# Altium PCB kernel_RJ45.PcbDoc
Units mil, origin at the board's own origin, x right, y up, seen from the top; angles counter-clockwise.
Board outline 1250 x 780 mil, 2 copper layers (Top Layer, Bottom Layer); 5 components, 13 nets, 36 pads, 28 vias.
Unrouted connection lines stored in the file: 1.
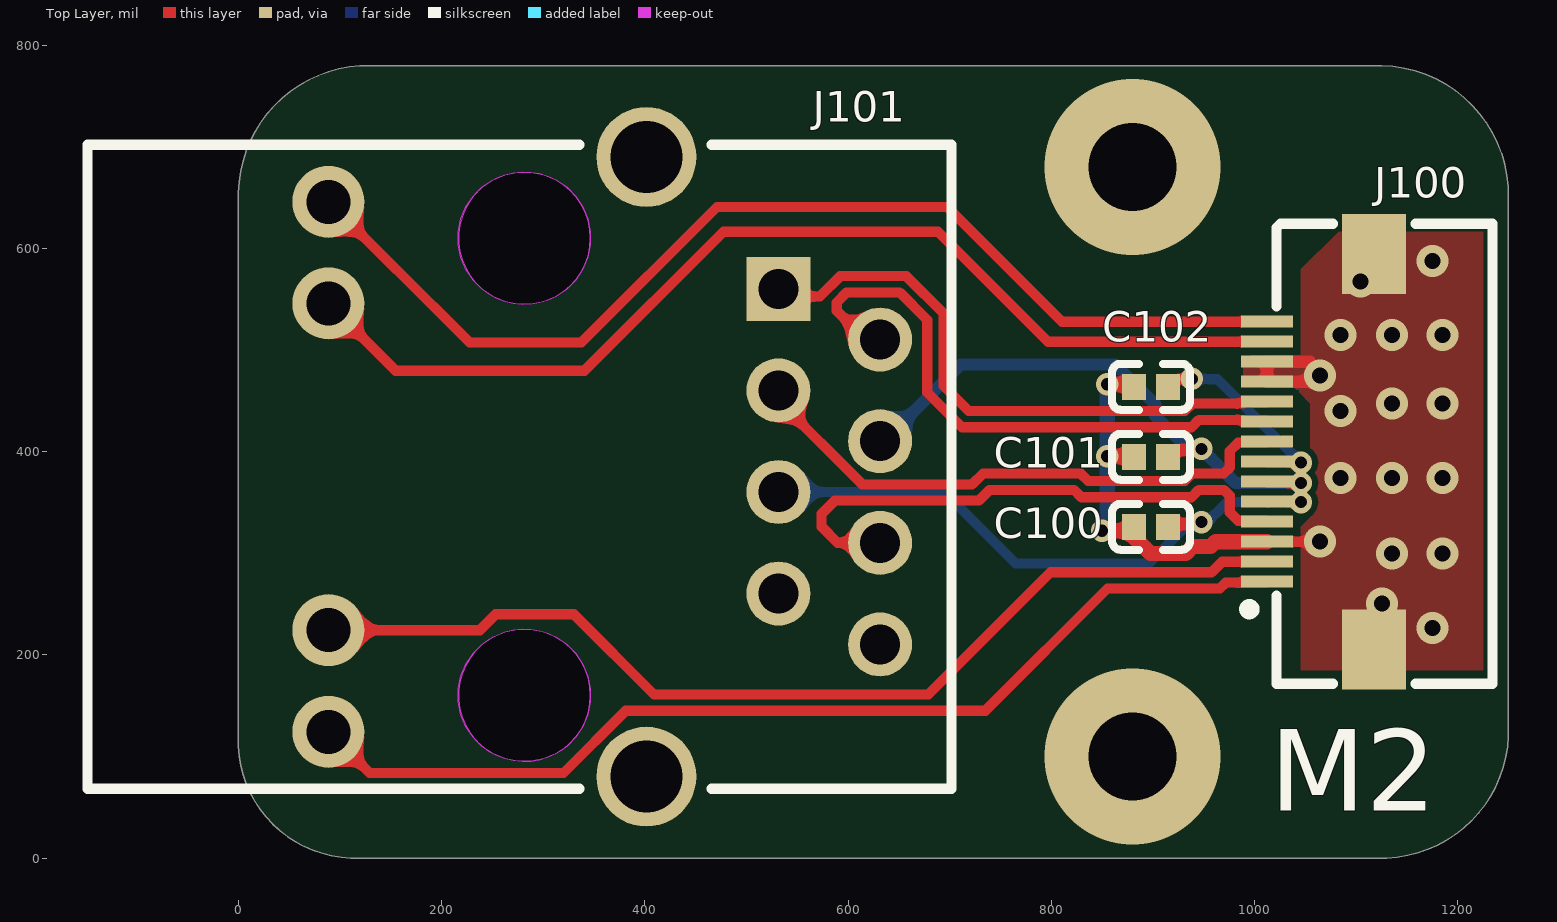
[diagram p0: Top Layer view]
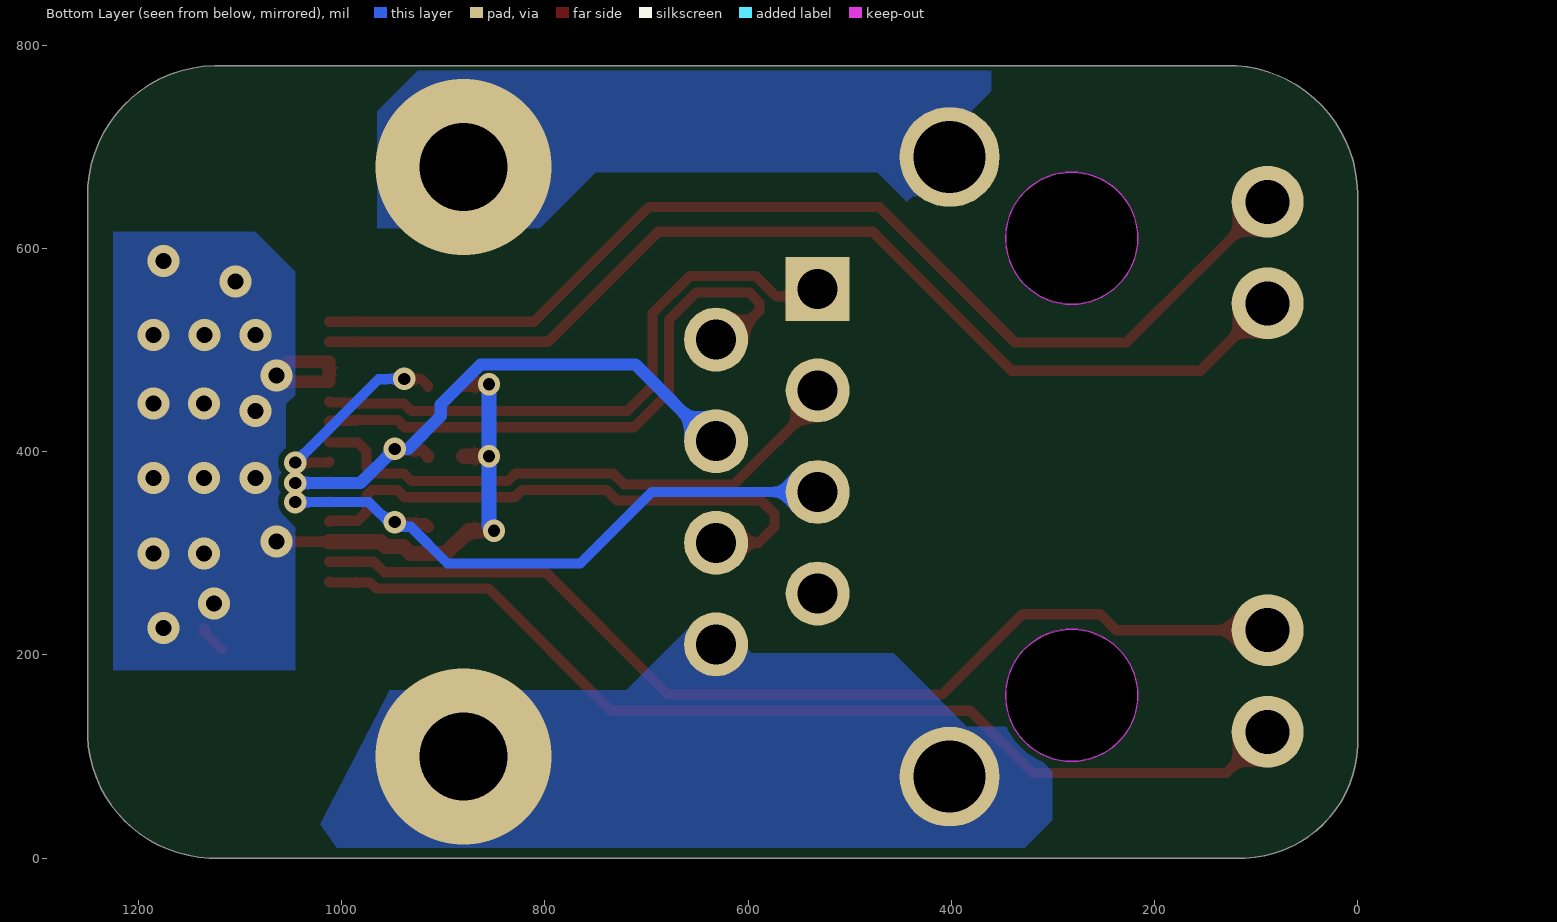
[diagram p1: Bottom Layer view, seen from below]
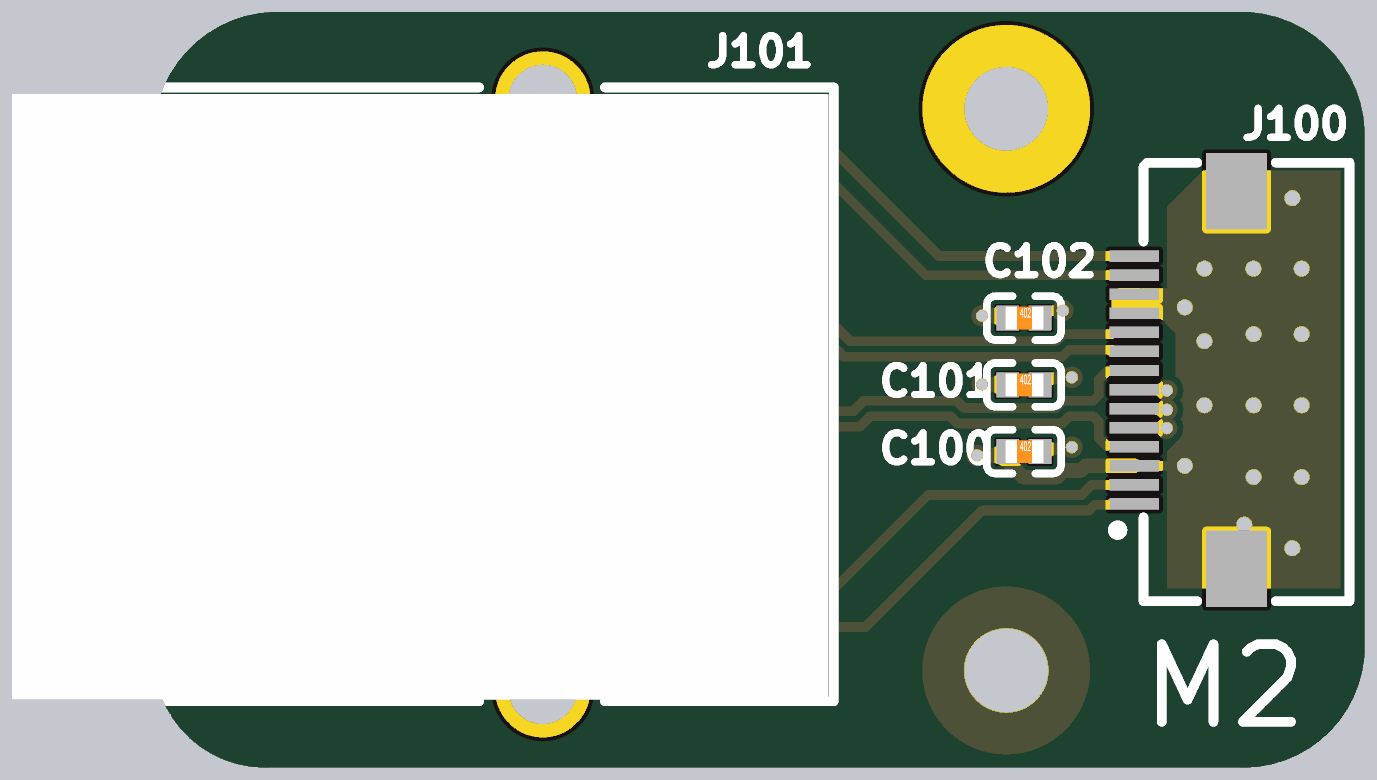
[diagram p2: 3D render of the assembled board from above, using the file's embedded part models]

## Layer stack, top to bottom
Top Solder: solder mask 0.4, Solder Resist, Dk 3.5
Top Layer: signal copper 1.4
Dielectric 1: dielectric 12.6, FR-4, Dk 4.8
Bottom Layer: signal copper 1.4
Bottom Solder: solder mask 0.4, Solder Resist, Dk 3.5

## Board outline
120,0 cw(c115,115) 0,110 0,655 cw(c127.5,652.5) 130,780 1125,780 cw(c1122.5,652.5) 1250,650 1250,120 cw(c1125,125) 1120,0

## Design rules (kind name [scope] priority, off if disabled: settings)
Clearance [All] p1: gap=6 ignorepadtopadclearanceinfootprint=FALSE
DiffPairsRouting DiffPair_DiffPairsRouting [InDifferentialPair ('D_TPRX')] p1: maxlimit=10 minlimit=6 mostfreqgap=6 toplayer_minwidth=6 toplayer_maxwidth=10 toplayer_prefwidth=6 bottomlayer_minwidth=6 bottomlayer_maxwidth=10 bottomlayer_prefwidth=6 maxuncoupledlength=500
DiffPairsRouting [All] p2: maxlimit=10 minlimit=10 mostfreqgap=10 toplayer_minwidth=15 toplayer_maxwidth=15 toplayer_prefwidth=15 bottomlayer_minwidth=15 bottomlayer_maxwidth=15 bottomlayer_prefwidth=15 maxuncoupledlength=500
PolygonConnect [All] p1: connectstyle=Direct reliefconductorwidth=10 reliefentries=4 polygonreliefangle="90 Angle" airgapwidth=10
RoutingVias [All] p1: holewidth=28 width=50 viastyle="Through Hole" minholewidth=28 minwidth=50 maxholewidth=28 maxwidth=50
SolderMaskExpansion [All] p1: expansion=4 istentingtop=FALSE
Width [InNetClass('电源')] p1: maxlimit=15 minlimit=10 preferedwidth=12 minimp=50.000000 maximp=50.000000 favimp=50.000000
29 further rules are at their usual default settings.

## Classes and differential pairs
net class 机壳地: SGND
net class 信号: LINKA LINKK SPEEDA SPEEDK
net class 电源: GND NetC100_2 NetC101_2 NetC102_2
differential pair D_TPRX: +TPRX_P -TPRX_N
differential pair D_TPTX: +TPTX_P -TPTX_N

## Components (designator, comment, footprint, x,y, rotation, side; value= is the part's Value field where it differs from the comment)
C100 "104" 0402_C 898.27,326.1 r0 top value=20pF
C101 "104" 0402_C 898.27,395 r0 top value=20pF
C102 "104" 0402_C 898.27,463.9 r0 top value=20pF
J100 "AFC01-S14FCA-00" FPC-SMD_AFC01-S14FCA-00 1065,400 r90 top
J101 "HR911105A" RJ45-TH_HR911105A 360,385.16 r270 top

## Footprints (in the part's own frame and the unit in brackets; to place one, negate y for a bottom-side part, rotate by r counter-clockwise, add the part's x,y. Pads: shape width x height; smd on the part's side, far side on the other; paste and mask are expansions set on the pad)
0402_C [mm]
  rect 0.6x0.65 smd mask+0.051: 1(-0.425,0) 2(0.425,0)
  silkscreen extent -0.97,-0.58 0.97,0.58, body extent -0.48,-0.3 0.52,0.3, height 0.2
FPC-SMD_AFC01-S14FCA-00 [mm]
  rect 0.3x1.3 smd: 1(-3.25,1.34) 2(-2.75,1.339) 3(-2.25,1.34) 4(-1.75,1.34) 5(-1.25,1.34) 6(-0.75,1.34) 7(-0.25,1.34) 8(0.25,1.34) 9(0.75,1.34) 10(1.25,1.34) 11(1.75,1.34) 12(2.25,1.34) 13(2.75,1.34) 14(3.25,1.34)
  rect 2x1.6 smd: 15(4.948,-1.34) 16(-4.948,-1.34)
  silkscreen extent -5.8,-4.3 5.7,1.9
RJ45-TH_HR911105A [mm]
  rect 1.6x1.6 hole 1: 1(-4.45,4.355)
  round 1.6 hole 1: 2(-3.18,6.895) 3(-1.91,4.355) 4(-0.64,6.895) 5(0.63,4.355) 6(1.9,6.895) 7(3.17,4.355) 8(4.44,6.895)
  round 1.8 hole 1.1: 9(-6.625,-6.895) 10(-4.085,-6.895) 11(4.085,-6.895) 12(6.625,-6.895)
  round 2.5 hole 1.8: SH1(-7.745,1.055) SH2(7.745,1.055)
  Keep-Out Layer board cut-out: 7.365,-1.995 7.365,-2.158 7.302,-2.476 7.177,-2.777 6.997,-3.047 6.767,-3.277 6.497,-3.457 6.196,-3.582 5.878,-3.645 5.552,-3.645 5.234,-3.582 4.933,-3.457 4.663,-3.277 4.433,-3.047 4.253,-2.777 4.128,-2.476 4.065,-2.158 4.065,-1.995 4.065,-1.833 4.128,-1.514 4.253,-1.213 4.433,-0.943 4.663,-0.713 4.933,-0.533 5.234,-0.408 5.552,-0.345 5.878,-0.345 6.196,-0.408 6.497,-0.533 6.767,-0.713 6.997,-0.943 7.177,-1.213 7.302,-1.514 7.365,-1.833 7.365,-1.995 7.365,-1.995
  Keep-Out Layer board cut-out: -4.065,-1.995 -4.065,-2.158 -4.128,-2.476 -4.253,-2.777 -4.433,-3.047 -4.663,-3.277 -4.933,-3.457 -5.234,-3.582 -5.552,-3.645 -5.878,-3.645 -6.196,-3.582 -6.497,-3.457 -6.767,-3.277 -6.997,-3.047 -7.177,-2.777 -7.302,-2.476 -7.365,-2.158 -7.365,-1.995 -7.365,-1.833 -7.302,-1.514 -7.177,-1.213 -6.997,-0.943 -6.767,-0.713 -6.497,-0.533 -6.196,-0.408 -5.878,-0.345 -5.552,-0.345 -5.234,-0.408 -4.933,-0.533 -4.663,-0.713 -4.433,-0.943 -4.253,-1.213 -4.128,-1.514 -4.065,-1.833 -4.065,-1.995 -4.065,-1.995
  Keep-Out Layer circle w0.025: c5.715,-1.995 r1.65
  Keep-Out Layer circle w0.025: c-5.715,-1.995 r1.65
  Keep-Out Layer region: 7.365,-1.995 7.365,-2.158 7.302,-2.476 7.177,-2.777 6.997,-3.047 6.767,-3.277 6.497,-3.457 6.196,-3.582 5.878,-3.645 5.552,-3.645 5.234,-3.582 4.933,-3.457 4.663,-3.277 4.433,-3.047 4.253,-2.777 4.128,-2.476 4.065,-2.158 4.065,-1.995 4.065,-1.833 4.128,-1.514 4.253,-1.213 4.433,-0.943 4.663,-0.713 4.933,-0.533 5.234,-0.408 5.552,-0.345 5.878,-0.345 6.196,-0.408 6.497,-0.533 6.767,-0.713 6.997,-0.943 7.177,-1.213 7.302,-1.514 7.365,-1.833 7.365,-1.995 7.365,-1.995
  Keep-Out Layer region: -4.065,-1.995 -4.065,-2.158 -4.128,-2.476 -4.253,-2.777 -4.433,-3.047 -4.663,-3.277 -4.933,-3.457 -5.234,-3.582 -5.552,-3.645 -5.878,-3.645 -6.196,-3.582 -6.497,-3.457 -6.767,-3.277 -6.997,-3.047 -7.177,-2.777 -7.302,-2.476 -7.365,-2.158 -7.365,-1.995 -7.365,-1.833 -7.302,-1.514 -7.177,-1.213 -6.997,-0.943 -6.767,-0.713 -6.497,-0.533 -6.196,-0.408 -5.878,-0.345 -5.552,-0.345 -5.234,-0.408 -4.933,-0.533 -4.663,-0.713 -4.433,-0.943 -4.253,-1.213 -4.128,-1.514 -4.065,-1.833 -4.065,-1.995 -4.065,-1.995
  silkscreen extent -8.05,-12.92 8.05,8.68, body extent -7.88,-12.86 8,8.54, height 13.5

## Part data
C100 C101 C102: library part 0402C_104, "电容100nf", JLCPCB Part Class="Basic Part", LCSC Part Name="20pF ±5% 50V", Manufacturer=FH(风华), Manufacturer Part=0402CG200J500NT, Temperature Coefficient=C0G, Tolerance=±5%, Voltage Rated=50V, Add into BOM=yes, Convert to PCB=yes, Datasheet=https://atta.szlcsc.com/upload/public/pdf/source/20170923/C1554_1506149268708988361.pdf, Device=0402CG200J500NT, Name=20pF, Supplier=LCSC, Supplier Footprint=0402, Supplier Part=C1554, Symbol=0402CG200J500NT
J100: "FPC", JLCPCB Part Class="Extended Part", LCSC Part Name="间距:0.5mm P数:14P 翻盖式 下接", Manufacturer=JS(钜硕电子), Operating Temperature Range=-, Add into BOM=yes, Contact Type=下接, Convert to PCB=yes, Datasheet=https://atta.szlcsc.com/upload/public/pdf/source/20190816/C413942_2A72D1AC756EAE17EEDF756A339D4500.pdf, Device=AFC01-S14FCA-00, FFC, FCB Thickness=0.3mm, Height Above Board=2mm, Locking Feature=翻盖式, Manufacturer Part=AFC01-S14FCA-00, Mounting Type=卧贴, Number of Contacts=14P, Pitch=0.5mm, Supplier=LCSC, Supplier Footprint=SMD,P=0.5mm,卧贴, Supplier Part=C262663, Symbol=AFC01-S14FCA-00
J101: library part HR911105A_C12074, JLCPCB Part Class="Extended Part", LCSC Part Name=带LED, Manufacturer=HANRUN(汉仁), Operating Temperature=-, Add into BOM=yes, Connector Type=RJ45插座, Contact Material=-, Contact Plating=-, Convert to PCB=yes, Datasheet=https://item.szlcsc.com/datasheet/HR911105A/12651.html, Device=HR911105A_C12074, LED=带LED, Manufacturer Part=HR911105A, Mounting Type=-, Number of Ports=1, PoE=不带PoE, Ratings=-, Shielding=-, Supplementary Features=带滤波, Supplier=LCSC, Supplier Footprint=插件, Supplier Part=C12074, Symbol=HR911105A_C12074

## Via types
v1: diameter 31.5, hole 15.75, Top Layer to Bottom Layer, tented both sides, 17 vias
v2: diameter 22, hole 12, Top Layer to Bottom Layer, tented both sides, 9 vias
v3: diameter 173.23, hole 86.61, Top Layer to Bottom Layer, 2 vias

## Nets (pads, with @x,y where several pads share a name; then routed paths per layer and width w, separated by ;. In a path a pad name is that pad's centre, name@x,y a point inside that pad or via, vN(x,y) a via of type N, cw(c..) or ccw(c..) an arc to the next point about the centre after c; other vN are vias at no path point)
GND: C100.1 C101.1 C102.1 J100.3 J100.11 J100.12 J100.15 J100.16 | length 547.4
  Top Layer w10: J100.3 v1@1053.93,311.42 ; J100.16 1135.18,222.62 J100.16@1135.18,225.93
  Top Layer w12: v1@1055,468.9 J100.11 J100.12 1054.33,488.58 1055,487.91
  Top Layer w15: v2(850,322.16) 875.24,322.16 897.6,299.8 932.4,299.8 939.2,306.6 956.98,306.6 961.8,311.42 J100.3 ; v2(855,395.47) C101.1@879.86,395.47 ; v2(855,466.37) C102.1@879.86,466.37
  Bottom Layer w15: v2(850,322.16) 855,327.16 v2(855,395.47) v2(855,466.37)
  other v1: 1175.37,226.36 1125.75,250.74 1135.37,299.8 1185,299.8 1064.33,311.42 1084.63,373.94 1135.37,373.94 1185,373.94 1084.63,440.1 1135.37,447.37 1185,447.37 1064.33,475 1084.63,515 1135.18,515 1185,515 1104.33,567.39 1175.37,587.75
LINKA: J100.1 J101.12 | length 1018.5
  Top Layer w10: J101.12 129.18,83.7 319.84,83.7 381.14,145 735,145 855.3,265.3 965.81,265.3 971.65,271.14 1011.33,271.14 J100.1
LINKK: J100.2 J101.11 | length 1017.1
  Top Layer w10: J101.11 237.49,224.33 253.16,240 330,240 409,161 678.95,161 799.25,281.3 957.84,281.3 968.27,291.73 J100.2
NetC100_2: C100.2 J100.5 J101.5 | length 636.8
  Top Layer w10: J100.5 J100.5@1013.03,350 ; J100.5@1013.15,350.35 v2(1045.75,350.35)
  Top Layer w12: C100.2 917.66,328.76 945.88,328.76 v2(947.8,330.68)
  Bottom Layer w10: J101.5 694.64,360.36 765,290 895.85,290 931.95,326.1 948.9,326.1 973.15,350.35 v2(1045.75,350.35)
NetC101_2: C101.2 J100.6 J101.4 | length 571
  Top Layer w10: J100.6 J100.6@1013.15,369.56 ; J100.6@1013.15,369.25 v2(1045.75,369.25)
  Top Layer w12: C101.2 915,395.98 920.81,401.8 946.8,401.8 v2(947.8,402.8)
  Bottom Layer w12: J101.4 635.36,410.36 710.87,485.87 863.08,485.87 902.4,446.55 902.4,435.2 934.8,402.8 v2(947.8,402.8) 981.34,369.25 v2(1045.75,369.25)
NetC102_2: C102.2 J100.7 | length 202.6
  Top Layer w10: C102.2 915,464.88 921.81,471.7 v2(938.41,471.7) ; J100.7 1013.15,389.25 v2(1045.75,389.25)
  Bottom Layer w10: v2(938.41,471.7) 955,471.7 955.38,471.31 963.69,471.31 v2(1045.75,389.25)
SGND: J101.8 J101.SH1 J101.SH2 | length 48.7
  Bottom Layer w10: J101.SH2 J101.SH2@436.01,80.24 ; J101.SH1 J101.SH1@406.58,685.04 ; v3@874.96,685.04 v3(880,680)
  other v3: 880,100.14
SPEEDA: J100.14 J101.9 | length 1083.1
  Top Layer w10: J101.9 155.15,579.39 155.61,579.39 227.41,507.59 337.57,507.59 470.91,640.93 697.64,640.93 810.62,527.95 J100.14
SPEEDK: J100.13 J101.10 | length 1052.7
  Top Layer w10: J101.10 154.86,479.67 340.42,479.67 477.31,616.56 688.44,616.56 796.73,508.27 J100.13
TPRX_N: J100.4 J101.6 | length 553.5
  Top Layer w10: J101.6 589.64,310.36 573.95,326.05 573.95,338.95 586.86,351.86 728.77,351.86 739.37,362.47 822.36,362.47 829.63,355.2 937.99,355.2 945.26,362.47 969.79,362.47 975.65,356.62 975.65,340.33 983.97,332.01 1011.33,332.01 J100.4
TPRX_P: J100.8 J101.3 | length 558
  Top Layer w10: J101.3 531.45,450.26 613.85,367.86 722.14,367.86 732.75,378.47 828.99,378.47 836.26,371.2 931.37,371.2 938.64,378.47 969.79,378.47 975.65,384.33 975.65,400.62 983.96,408.93 1011.33,408.93 J100.8
TPTX_N: J100.9 J101.2 | length 589
  Top Layer w10: J101.2@628.69,507.59 619.89,507.59 588.84,538.64 588.84,546.92 598.77,556.86 650.71,556.86 677.95,529.62 677.95,458.32 712.17,424.1 937.99,424.1 945.26,431.37 988.9,431.37 989.84,430.44 1011.33,430.44 J100.9
TPTX_P: J100.10 J101.1 | length 592.7
  Top Layer w10: J101.1 539.01,552.81 572.09,552.81 592.14,572.86 657.34,572.86 693.95,536.25 693.95,464.95 718.8,440.1 931.37,440.1 938.63,447.37 988.9,447.37 989.84,448.3 1011.33,448.3 J100.10
pads on no net: J101.7

## Polygon pours and split planes (outlines as drawn)
GND on Bottom Layer "GND_L02_P012" (solid, pour order 12): 1085,616.56 1225,616.56 1225,185 1045.77,185 1045.75,325.75 1055,335 1055,446.55 1045.75,455.8 1045.75,577.3
SGND on Bottom Layer "Bottom Layer-SGND 1" (solid, pour order 4): 385,130 456.57,201.57 596.57,201.57 625,230 655,230 720,165 952.59,165 1020.88,33.49 1005,10 327.55,10 300.4,37.14 300.4,85 344.79,129.39 385,129.39
SGND on Bottom Layer "Bottom Layer-SGND" (solid, pour order 6): 360.67,755 380,735.67 380,651.57 438.03,651.57 443.61,645.99 472.74,675.12 749.88,675.12 805,620 965,620 965,735 925,775 360.67,775
GND on Top Layer "GND_L01_P021" (solid, pour order 21): 1225,616.56 1225,185.02 1045.75,185.02 1045.75,326.05 1055,335.3 1055,447.37 1033.62,468.75 1033.62,468.9 991.7,468.9 988.9,471.7 988.9,487.65 996.26,495 1045.75,495 1045.75,579.39 1082.91,616.56

## Silkscreen, mask and mechanical layers (free items; w line width, h text height)
Top Overlay:
  text "M2" at 1015,46.67 h80
Mechanical 1:
  the board outline again, w6

## Dimensions
-148.46,68.23 to 0,110 on Top Overlay
-148.46,702.09 to -148.46,68.23 on Top Overlay
1250,780 to 1120,0 on Top Overlay
0,780 to 1250,650 on Top Overlay